# EAGLE board Grove - Water Level Sensor (10CM) (1) (EAGLE 9.6.2)
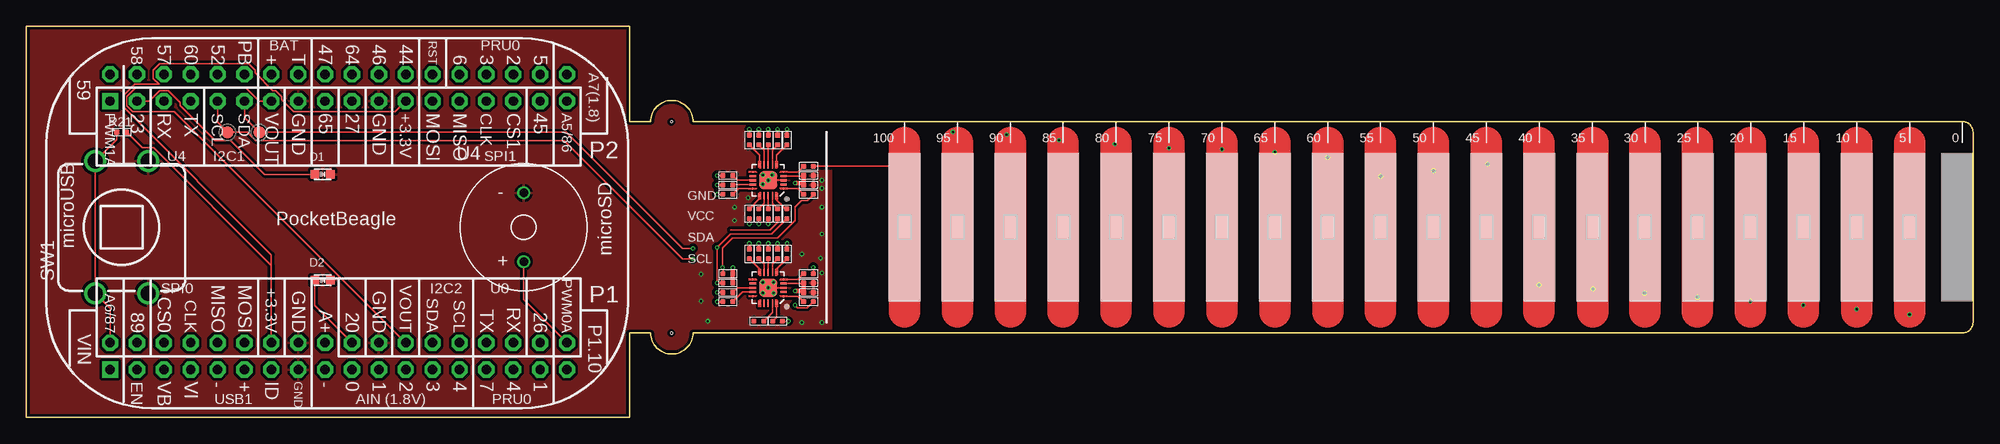
[diagram p0: board, top side]
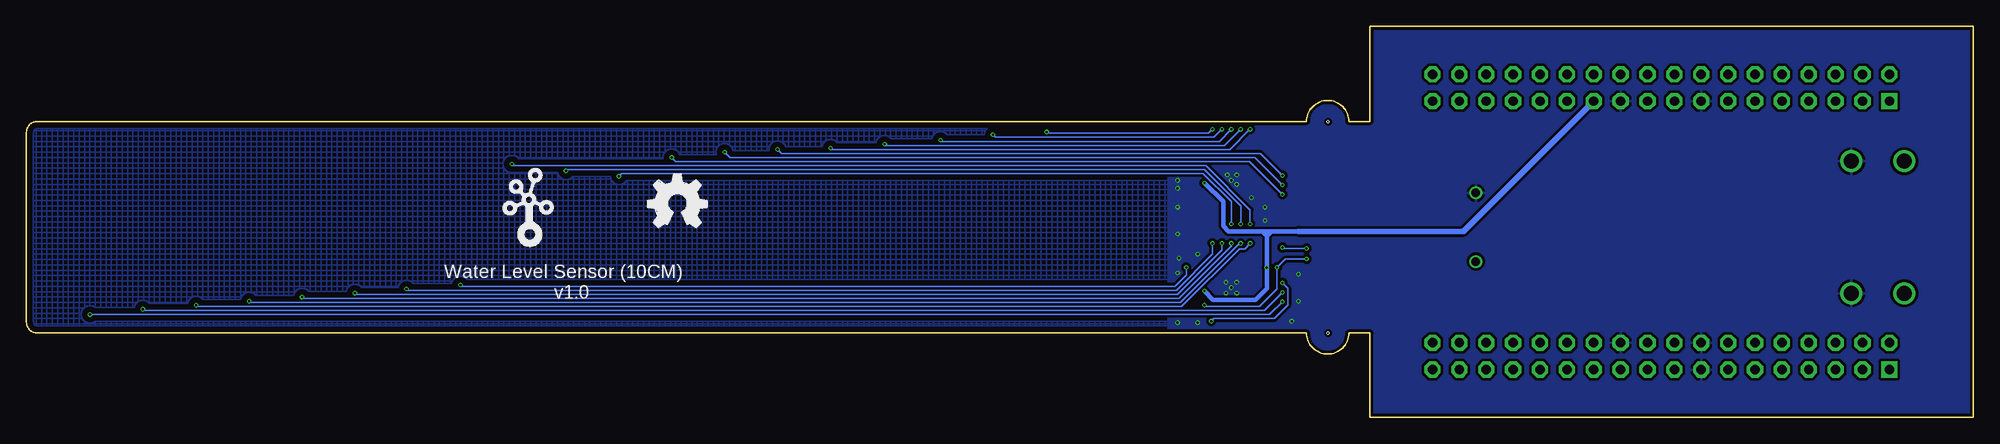
[diagram p1: board, bottom side, seen from below]

Size 184 x 37 mm. Coordinates in mm from the lower left corner, seen from the top.
Outline: 63,8 183,8 arc90 184,9 184,27 arc90 183,28 63,28 arc180 59,28 57,28 57,37 0,37 0,0 57,0 57,8 59,8 arc180 63,8
Copper layers (1*16): Top 0.035mm / dielectric 1.5mm / Bottom 0.035mm
Design rules "SeeedStudio_2layer_DRU_no_angle_20140221 *": minimum track width 1mil, minimum drill 8mil, track to track 6mil, track to pad 6mil, pad to pad 6mil, via to via 6mil, smd to smd 0mil, copper to edge 10mil, drill to drill 10mil, minimum pad ring 4mil, minimum via ring 4mil, stop-mask expansion 2mil, vias tented up to drill 25mil, thermal gap 10mil
Holes 0.2 mm at 60.97,7.99 60.97,27.99

## Footprints (pad centres in the part's own frame; a part is rotated, then mirrored left to right if it is on the bottom)
C0402 = smd 0.5 x 0.5: 1 -0.463,0; 2 0.463,0
EIA-STD = smd 0.8 x 0.8: ANODE -0.75,0; CATHODE 0.75,0
R0402 = smd 0.5 x 0.5: 1 -0.463,0; 2 0.463,0
BUTTON_12.5MM = drill 1.4: 1 -6.25,2.5; 2 -6.25,-2.5; 3 6.25,2.5; 4 6.25,-2.5
TP-80X40MIL-NOSTOP = smd 2.032 x 1.016: P$1 0,0
TP-D45MIL = smd 1.143 x 1.143: T 0,0
VQFN20-0.4-3X3MM = smd 0.178 x 0.178: 1 -0.8,-1.45; 5 0.8,-1.45; 6 1.45,-0.8; 10 1.45,0.8; 11 0.8,1.45; 15 -0.8,1.45; 16 -1.45,0.8; 20 -1.45,-0.8 | smd 0.2 x 0.7: 2 -0.4,-1.45; 3 0,-1.45; 4 0.4,-1.45; 12 0.4,1.45; 13 0,1.45; 14 -0.4,1.45 | smd 0.7 x 0.2: 7 1.45,-0.4; 8 1.45,0; 9 1.45,0.4; 17 -1.45,0.4; 18 -1.45,0; 19 -1.45,-0.4 | smd 1.7 x 1.7: 21 0,0
POCKETBEAGLE = drill 0.889 pad 1.524 square: P1_01 5.91,3.53; P2_01 5.91,28.93 | drill 0.889 pad 1.524 octagon: P1_02 5.91,6.07; P1_03 8.45,3.53; P1_04 8.45,6.07; P1_05 10.99,3.53; P1_06 10.99,6.07; P1_07 13.53,3.53; P1_08 13.53,6.07; P1_09 16.07,3.53; P1_10 16.07,6.07; P1_11 18.61,3.53; P1_12 18.61,6.07; P1_13 21.15,3.53; P1_14 21.15,6.07; P1_15 23.69,3.53; P1_16 23.69,6.07; P1_17 26.23,3.53; P1_18 26.23,6.07; P1_19 28.77,3.53; P1_20 28.77,6.07; P1_21 31.31,3.53; P1_22 31.31,6.07; P1_23 33.85,3.53; P1_24 33.85,6.07; P1_25 36.39,3.53; P1_26 36.39,6.07; P1_27 38.93,3.53; P1_28 38.93,6.07; P1_29 41.47,3.53; P1_30 41.47,6.07; P1_31 44.01,3.53; P1_32 44.01,6.07; P1_33 46.55,3.53; P1_34 46.55,6.07; P1_35 49.09,3.53; P1_36 49.09,6.07; P2_02 5.91,31.47; P2_03 8.45,28.93; P2_04 8.45,31.47; P2_05 10.99,28.93; P2_06 10.99,31.47; P2_07 13.53,28.93; P2_08 13.53,31.47; P2_09 16.07,28.93; P2_10 16.07,31.47; P2_11 18.61,28.93; P2_12 18.61,31.47; P2_13 21.15,28.93; P2_14 21.15,31.47; P2_15 23.69,28.93; P2_16 23.69,31.47; P2_17 26.23,28.93; P2_18 26.23,31.47; P2_19 28.77,28.93; P2_20 28.77,31.47; P2_21 31.31,28.93; P2_22 31.31,31.47; P2_23 33.85,28.93; P2_24 33.85,31.47; P2_25 36.39,28.93; P2_26 36.39,31.47; P2_27 38.93,28.93; P2_28 38.93,31.47; P2_29 41.47,28.93; P2_30 41.47,31.47; P2_31 44.01,28.93; P2_32 44.01,31.47; P2_33 46.55,28.93; P2_34 46.55,31.47; P2_35 49.09,28.93; P2_36 49.09,31.47
BUZZER_6.5MM = drill 0.8: + 0,-3.25; - 0,3.25

## Placement (x,y rotation side)
C1  100nF  [C0402]  73.92,22 180 top
C2  4.7uF  [C0402]  73.92,22.89 180 top
C3  100nF  [C0402]  73.92,11.84 180 top
C4  4.7uF  [C0402]  73.92,12.73 180 top
D1  GREEN LED  [EIA-STD]  28,23 0 top
D2  RED LED  [EIA-STD]  28,13 0 top
LOGO2  LOGO-OSHW-FILLX0200-NT  [OSHW_FILLX200_NOTEXT]  125.31,17.97 0 bottom
R1  4.7k  [R0402]  66.3,13.62 0 top
R2  4.7k  [R0402]  66.3,12.73 0 top
R3  0R  [R0402]  71,19.28 90 top
R4  0R  [R0402]  69.22,9.11 0 top
R5  1k  [R0402]  73.92,23.78 180 top
R6  1k  [R0402]  71.89,26.26 270 top
R7  1k  [R0402]  71,26.26 270 top
R8  1k  [R0402]  70.11,26.26 270 top
R9  1k  [R0402]  66.3,22 0 top
R10  1k  [R0402]  66.3,22.89 0 top
R11  1k  [R0402]  68.33,26.26 270 top
R12  1k  [R0402]  69.22,26.26 270 top
R13  1k  [R0402]  70.11,19.28 270 top
R14  1k  [R0402]  69.22,19.28 270 top
R15  1k  [R0402]  68.33,19.28 270 top
R16  1k  [R0402]  66.3,21.11 180 top
R17  0R  [R0402]  71.89,19.28 90 top
R18  0R  [R0402]  73.92,21.11 180 top
R19  0R  [R0402]  71,9.11 180 top
R20  0R  [R0402]  73.92,10.95 180 top
R21  4.7k  [R0402]  9,27 0 top
R23  1k  [R0402]  73.92,13.62 180 top
R24  1k  [R0402]  71.89,15.49 270 top
R25  1k  [R0402]  71,15.49 270 top
R26  1k  [R0402]  70.11,15.49 270 top
R27  1k  [R0402]  66.3,10.95 0 top
R28  1k  [R0402]  66.3,11.84 0 top
R29  1k  [R0402]  68.33,15.49 270 top
R30  1k  [R0402]  69.22,15.49 270 top
SW1  PUSH_BUTTON  [BUTTON_12.5MM]  9,18 90 top
TP1  senser  [TP-80X40MIL-NOSTOP]  83,18 90 top
TP2  senser  [TP-80X40MIL-NOSTOP]  88,18 90 top
TP3  senser  [TP-80X40MIL-NOSTOP]  93,18 90 top
TP4  senser  [TP-80X40MIL-NOSTOP]  98,18 90 top
TP5  senser  [TP-80X40MIL-NOSTOP]  103,18 90 top
TP6  senser  [TP-80X40MIL-NOSTOP]  108,18 90 top
TP7  senser  [TP-80X40MIL-NOSTOP]  113,18 90 top
TP8  senser  [TP-80X40MIL-NOSTOP]  118,18 90 top
TP9  senser  [TP-80X40MIL-NOSTOP]  123,18 90 top
TP10  senser  [TP-80X40MIL-NOSTOP]  128,18 90 top
TP11  senser  [TP-80X40MIL-NOSTOP]  133,18 90 top
TP12  senser  [TP-80X40MIL-NOSTOP]  138,18 90 top
TP13  senser  [TP-80X40MIL-NOSTOP]  148.08,18 90 top
TP14  senser  [TP-80X40MIL-NOSTOP]  152.95,18 90 top
TP15  senser  [TP-80X40MIL-NOSTOP]  157.95,18 90 top
TP16  senser  [TP-80X40MIL-NOSTOP]  162.95,18 90 top
TP17  senser  [TP-80X40MIL-NOSTOP]  167.95,18 90 top
TP18  senser  [TP-80X40MIL-NOSTOP]  142.98,18 90 top
TP19  senser  [TP-80X40MIL-NOSTOP]  178,18 90 top
TP20  senser  [TP-80X40MIL-NOSTOP]  173,18 90 top
TP21  test  [TP-D45MIL]  19,27 0 top
TP22  test  [TP-D45MIL]  22,27 0 top
U1  ATTINY1616  [VQFN20-0.4-3X3MM]  70.11,22.45 90 top
U2  ATTINY1616  [VQFN20-0.4-3X3MM]  70.11,12.28 90 top
U3  POCKETBEAGLE  [POCKETBEAGLE]  2,1 0 top
U4  BUZZER  [BUZZER_6.5MM]  47,18 0 top
U$2  LOGO-GROVE  [GROVE-SILK-BIG]  136.48,17.12 0 bottom

## Library data of the parts
C1-C4 R1-R21 R23-R30 TP1-TP20 = Discrete-new
D1 D2 SW1 U3 U4 = combo_lock
LOGO2 U$2 = logo; PARTNO: DNP
TP21 TP22 = Discrete-new; PARTNO: DNP
U1 U2 = IC-new

## Nets
BAT.VIN: U3.P2_14
BUTTON: R21.1 SW1.1 SW1.3 U3.P1_02
BUZZER: U3.P1_36 U4.+
GND: C1.1 C2.1 C3.1 C4.1 D1.CATHODE D2.CATHODE SW1.2 SW1.4 U1.3 U1.21 U2.3 U2.21 U3.P1_15 U3.P1_16 U3.P1_22 U3.P2_15 U3.P2_21 U4.-
GREEN_LED: D1.ANODE U3.P2_03
N$1: R3.2 U1.19
N$2: R4.2 U2.19
N$3: R17.2 U1.20
N$4: R18.2 U1.1
N$5: R19.2 U2.20
N$6: R20.2 U2.1
N$7: R23.1 TP18.P$1
N$8: R29.1 TP17.P$1
N$9: R30.2 U2.9
N$10: R29.2 U2.10
N$11: R28.2 U2.13
N$12: R27.2 U2.14
N$13: R26.2 U2.8
N$14: R25.2 U2.7
N$15: R24.2 U2.6
N$16: R23.2 U2.5
N$17: R28.1 TP20.P$1
N$18: R27.1 TP19.P$1
N$19: R5.2 U1.5
N$20: R6.2 U1.6
N$21: R7.2 U1.7
N$22: R8.2 U1.8
N$23: R9.2 U1.14
N$24: R10.2 U1.13
N$26: R25.1 TP14.P$1
N$27: R11.2 U1.10
N$28: R12.2 U1.9
N$29: R13.1 U1.18
N$30: R14.1 U1.17
N$31: R15.1 U1.16
N$32: R16.1 U1.15
N$33: R11.1 TP6.P$1
N$34: R12.1 TP5.P$1
N$35: R26.1 TP15.P$1
N$36: R30.1 TP16.P$1
N$37: R10.1 TP7.P$1
N$38: R9.1 TP8.P$1
N$39: R24.1 TP13.P$1
N$40: R13.2 TP10.P$1
N$41: R14.2 TP11.P$1
N$42: R15.2 TP12.P$1
N$43: R5.1 TP1.P$1
N$44: R6.1 TP2.P$1
N$45: R7.1 TP3.P$1
N$46: R8.1 TP4.P$1
N$50: R16.2 TP9.P$1
RED_LED: D2.ANODE U3.P1_20
SCL: R1.1 R18.1 R20.1 TP21.T U3.P2_09
SDA: R2.1 R17.1 R19.1 TP22.T U3.P2_11
UPDI1: R3.1
UPDI2: R4.1
VCC: C1.2 C2.2 C3.2 C4.2 R1.2 R2.2 R21.2 U1.4 U2.4 U3.P1_14 U3.P2_23
VIN: U3.P1_01
VOUT: U3.P1_24 U3.P2_13

## Tracks (layer width: path | path; a pad name or v marks a point on that pad's centre or on a via)
BUTTON
  Top 0.152: U3.P1_02 7.91,10.34 SW1.1 SW1.3 8.54,26.29 R21.1
BUZZER
  Top 0.152: U3.P1_36 47,11.16 U4.+
GND  (via drill 0.2 pad 0.41)
  Top 0.152: C4.1 74.38,12.75 | U1.3 U1.21 | U2.3 U2.21
  other vias: 70.11,22.45 75.19,22.45 75.19,21.68 70.11,12.29 69.6,12.79 70.62,12.79 70.62,11.78 69.6,11.78 75.19,13.68 75.06,15.08 73.28,15.46 75.19,17.36 75.19,19.91 73.28,8.98 75.19,8.98 70.49,22.95 69.6,22.06 69.6,22.95 68.2,20.79 66.94,19.91 66.94,18.64 63.76,13.55 63.76,11.02 64.39,9.11
  pour Bottom (isolate 0.254): -2,39 59,39 59,31 76,31 76.08,31.08 76.08,4.92 76,5 59,5 59,-2 -2,-2
  pour Top (isolate 0.254): -2,39 59,39 59,31 76,31 76.08,31.08 76.08,5 59,5 59,-2 -2,-2
  pour Bottom (isolate 0.508, hatched): 73.28,30.95 183.33,30.95 183.71,30.57 183.71,4.79 183.58,4.66 76.46,4.66 73.28,7.84
GREEN_LED
  Top 0.152: U3.P2_03 11.59,29.93 12.58,30.92 13.4,30.92 14.54,29.78 14.54,29.52 17.86,26.2 19.3,26.2 22.5,23 D1.ANODE
N$1
  Top 0.152: U1.19 70.51,20.23 R3.2
N$2
  Top 0.152: U2.19 70.51,9.94 R4.2
N$3
  Top 0.152: U1.20 70.91,20.57 71.25,20.22 71.27,20.22 71.48,20.02 71.48,20 71.73,19.75 R17.2
N$4
  Top 0.152: U1.1 72.92,21.64 R18.2
N$5
  Top 0.152: U2.20 70.91,9.48 R19.2
N$6
  Top 0.152: U2.1 72.93,11.48 R20.2
N$7  (via drill 0.2 pad 0.41)
  Top 0.152: R23.1 74.38,14.17 v74.36,14.19
  Top 3: 142.98,26 TP18.P$1 v142.98,12.54 142.98,10
  Bottom 0.152: v142.98,12.54 142.85,12.41 75.44,12.41 74.36,13.49 v74.36,14.19
N$8  (via drill 0.2 pad 0.41)
  Top 0.152: R29.1 v68.33,16.48
  Top 3: 167.95,26 TP17.P$1 v167.95,10.63 167.95,10
  Bottom 0.152: v167.95,10.63 167.83,10.51 74.81,10.51 69.35,15.97 68.84,15.97 v68.33,16.48
N$9
  Top 0.152: U2.9 69.71,14.53 R30.2
N$10
  Top 0.152: U2.10 69.31,14.04 R29.2
N$11
  Top 0.152: U2.13 67.2,12.28 R28.2
N$12
  Top 0.152: U2.14 67.69,11.88 R27.2
N$13
  Top 0.152: U2.8 R26.2
N$14
  Top 0.152: U2.7 70.51,14.53 R25.2
N$15
  Top 0.152: U2.6 70.91,14.04 R24.2
N$16
  Top 0.152: U2.5 72.92,13.08 R23.2
N$17  (via drill 0.2 pad 0.41)
  Top 0.152: R28.1 v65.28,11.84
  Top 3: 173,26 TP20.P$1 v173,10.25 173,10
  Bottom 0.152: v65.28,11.84 67,10.13 172.87,10.13 v173,10.25
N$18  (via drill 0.2 pad 0.41)
  Top 0.152: 178,9.11 v178,9.74 | v178,9.74 178,10 | R27.1 v65.28,10.95 | v178,9.74 178,11.39 178,11.4
  Top 3: 178,26 TP19.P$1 178,11.4 178,10
  Bottom 0.152: v65.28,10.95 66.49,9.74 v178,9.74
N$19
  Top 0.152: U1.5 72.92,23.25 R5.2
N$20
  Top 0.152: U1.6 70.91,24.81 R6.2
N$21
  Top 0.152: U1.7 70.51,25.3 R7.2
N$22
  Top 0.152: U1.8 R8.2
N$23
  Top 0.152: U1.14 66.81,22.05 R9.2
N$24
  Top 0.152: U1.13 67.21,22.45 R10.2
N$26  (via drill 0.2 pad 0.41)
  Top 0.152: R25.1 v71,16.48
  Top 3: 152.95,26 TP14.P$1 v152.95,11.78 152.95,10
  Bottom 0.152: v152.95,11.78 152.83,11.65 75.19,11.65 71,15.84 v71,16.48
N$27
  Top 0.152: U1.10 69.31,24.81 R11.2
N$28
  Top 0.152: U1.9 69.71,25.3 R12.2
N$29
  Top 0.152: U1.18 R13.1
N$30
  Top 0.152: U1.17 69.71,20.23 R14.1
N$31
  Top 0.152: U1.16 69.31,20.72 R15.1
N$32
  Top 0.152: U1.15 67.3,21.64 R16.1
N$33  (via drill 0.2 pad 0.41)
  Top 0.152: R11.1 v68.33,27.27
  Top 3: 108,26 v108,25.49 TP6.P$1 108,10
  Bottom 0.152: v68.33,27.27 70.24,25.37 107.87,25.37 v108,25.49
N$34  (via drill 0.2 pad 0.41)
  Top 0.152: R12.1 v69.22,27.27 | 103,26 103,26.82 103.32,27.14 103.32,26.32 103,26 | v102.88,25.87 v102.87,25.87 103,26
  Top 3: 103,26 TP5.P$1 103,10
  Bottom 0.152: v69.22,27.27 70.75,25.75 102.75,25.75 v102.88,25.87
N$35  (via drill 0.2 pad 0.41)
  Top 0.152: R26.1 v70.11,16.48
  Top 3: 157.95,26 TP15.P$1 v157.95,11.4 157.95,10
  Bottom 0.152: v157.95,11.4 157.83,11.27 75.06,11.27 70.11,16.22 v70.11,16.48 70.11,16.35
N$36  (via drill 0.2 pad 0.41)
  Top 0.152: R30.1 v69.22,16.48
  Top 3: 162.95,26 TP16.P$1 v162.95,11.02 162.95,10
  Bottom 0.152: v162.95,11.02 162.83,10.89 74.94,10.89 69.35,16.48 v69.22,16.48
N$37  (via drill 0.2 pad 0.41)
  Top 0.152: R10.1 v65.28,22.89 | 113,25.87 113,26.54 113.23,26.76 113.23,26.1 113,25.87
  Top 3: 113,26 113,25.87 v113,25.37 TP7.P$1 113,10
  Bottom 0.152: v65.28,22.89 67.38,24.98 112.62,24.98 v113,25.37
N$38  (via drill 0.2 pad 0.41)
  Top 0.152: R9.1 v65.28,22
  Top 3: 118,26 v118,25.11 TP8.P$1 118,10
  Bottom 0.152: v65.28,22 67.89,24.6 117.49,24.6 v118,25.11
N$39  (via drill 0.2 pad 0.41)
  Top 0.152: R24.1 v71.89,16.48
  Top 3: 148.08,26 TP13.P$1 v148.08,12.16 148.08,10
  Bottom 0.152: v148.08,12.16 147.95,12.03 75.32,12.03 71.89,15.46 v71.89,16.48
N$40  (via drill 0.2 pad 0.41)
  Top 0.152: R13.2 v70.11,18.32
  Top 3: 128,26 v128,22.83 TP10.P$1 128,10
  Bottom 0.152: v128,22.83 127.75,23.08 72.78,23.08 70.11,20.41 v70.11,18.32
N$41  (via drill 0.2 pad 0.41)
  Top 0.152: v69.22,18.32 R14.2
  Top 3: 133,26 v133,23.33 TP11.P$1 133,10
  Bottom 0.152: v133,23.33 132.87,23.46 72.65,23.46 69.22,20.03 v69.22,18.32
N$42  (via drill 0.2 pad 0.41)
  Top 0.152: v138.12,23.97 138.12,18.12 TP12.P$1 | v68.33,18.32 R15.2
  Top 3: 138,26 TP12.P$1 138,10
  Bottom 0.152: v138.12,23.97 137.99,23.84 72.52,23.84 68.33,19.65 v68.33,18.32
N$43
  Top 0.152: R5.1 82.68,23.78 83,23.46
  Top 3: 83,26 83,23.46 TP1.P$1 83,10
N$44  (via drill 0.2 pad 0.41)
  Top 0.152: R6.1 v71.89,27.27 | v87.57,27.02 87.57,26.43 88,26
  Top 3: 88,26 TP2.P$1 88,10
  Bottom 0.152: v71.89,27.27 72.27,26.89 87.44,26.89 v87.57,27.02
N$45  (via drill 0.2 pad 0.41)
  Top 0.152: R7.1 v71,27.27 | v92.65,26.76 93,26.41 93,26
  Top 3: 93,10 TP3.P$1 93,26
  Bottom 0.152: v71,27.27 71.76,26.51 92.4,26.51 v92.65,26.76
N$46  (via drill 0.2 pad 0.41)
  Top 0.152: R8.1 v70.11,27.27 | v97.61,26.26 97.75,26.26 98,26
  Top 3: 98,26 TP4.P$1 98,10
  Bottom 0.152: v70.11,27.27 71.25,26.13 97.48,26.13 v97.61,26.26
N$50  (via drill 0.2 pad 0.41)
  Top 0.152: R16.2 v65.28,21.11
  Top 3: 123,26 v123,24.6 TP9.P$1 123,10
  Bottom 0.152: v65.28,21.11 68.4,24.22 122.62,24.22 v123,24.6
RED_LED
  Top 0.152: U3.P1_20 27.25,10.59 D2.ANODE
SCL  (via drill 0.2 pad 0.41)
  Top 0.152: R20.1 74.36,10.95 73.79,10.38 72.9,10.38 v72.65,10.63 | R1.1 65.84,14.14 v65.79,14.19 65.79,16.02 66.76,16.98 71,16.98 72.65,18.64 72.65,19.91 73.28,20.54 73.81,20.54 R18.1 | v63,15 62,15 50.8,26.2 21.67,26.2 20.87,27 TP21.T 18.07,27.93 U3.P2_09
  Bottom 0.152: v72.65,10.63 72.52,10.51 67.44,10.51 65.79,12.16 v65.79,14.19 64.98,15 v63,15
SDA  (via drill 0.2 pad 0.41)
  Top 0.152: R17.1 70.43,17.36 66.55,17.36 v65.28,16.09 v65.28,12.73 R2.1 | R19.1 v72.02,9.11 | v63,16 62,16 51,27 TP22.T 20.61,28.39 U3.P2_11
  Bottom 0.152: v72.02,9.11 71.76,9.36 66.05,9.36 64.78,10.63 64.78,12.22 v65.28,12.73 | v65.28,16.09 65.19,16 v63,16
UPDI1
  Top 0.152: R3.1 71,18.46 70.28,17.75 66.55,17.75
VCC  (via drill 0.2 pad 0.41)
  Top 0.152: U2.4 73.41,12.68 C4.2 | C3.2 73.46,11.97 | U1.4 73.41,22.84 C2.2 C1.2 | R21.2 10.93,25.53 12.03,25.53 23.15,14.41 U3.P1_14 23.15,15.4 9.16,29.39 9.16,30.47 10.22,31.53 12.53,31.53 12,32.06 12,32.88 12.58,33.46 21.02,33.46 21.6,32.88 21.6,32.62 23.3,30.92 23.56,30.92 24.14,30.34 24.14,30.08 25.28,28.94 34.86,28.94 U3.P2_23
  Top 0.406: v72.65,11.97 73.46,11.97 | 73.46,11.95 C3.2 | C4.2 73.46,11.97 | 73.46,11.97 73.46,11.95 | 73.46,11.95 73.41,11.9 | R2.2 R1.2 v66.76,14.17 | 73.41,22.83 73.46,22.78 C1.2 73.27,22.19 v72.65,22.19
  Bottom 0.152: 66.3,17.62 66.46,17.62 66.76,17.32
  Bottom 0.406: v72.65,11.97 71.83,11.14 67.82,11.14 66.76,12.2 v66.76,14.17 66.76,17.16 | 66.76,17.19 66.76,17.32 66.76,17.54 66.68,17.62 | v72.65,22.19 70.87,20.41 70.87,18.13 70.36,17.62 67.19,17.62 | 67.19,17.62 66.68,17.62 | 66.68,17.62 66.3,17.62 | 66.3,17.62 63.76,17.62 | 66.76,17.16 66.3,17.62 | 66.76,17.16 66.76,17.19 | 66.76,17.19 67.19,17.62
  Bottom 0.508: U3.P2_23 48.16,17.62 63.76,17.62
VOUT
  Top 0.152: U3.P1_24 13.98,28.94 10.04,28.94 9.46,29.52 9.46,30.34 10.34,31.23 20.72,31.23 22.01,29.93 U3.P2_13

## Text on the board
tNames: 100 | 95 | 90 | 85 | 80 | 75 | 70 | 65 | 60 | 55 | 50 | 45 | 40 | 35 | 30 | 25 | 20 | 15 | 10 | 5 | 0 | GND | VCC | SDA | SCL
bNames: Water Level Sensor (10CM) / v1.0